# Altium PCB KNX-RELAY-24CH_V1.2.PcbDoc (part 1 of 2)
Units mm, origin at the board's own origin, x right, y up, seen from the top; angles counter-clockwise.
Board outline 85 x 205.5 mm, 2 copper layers (F.Cu, B.Cu); 269 components, 236 nets, 839 pads, 840 vias.
Unrouted connection lines stored in the file: 293.
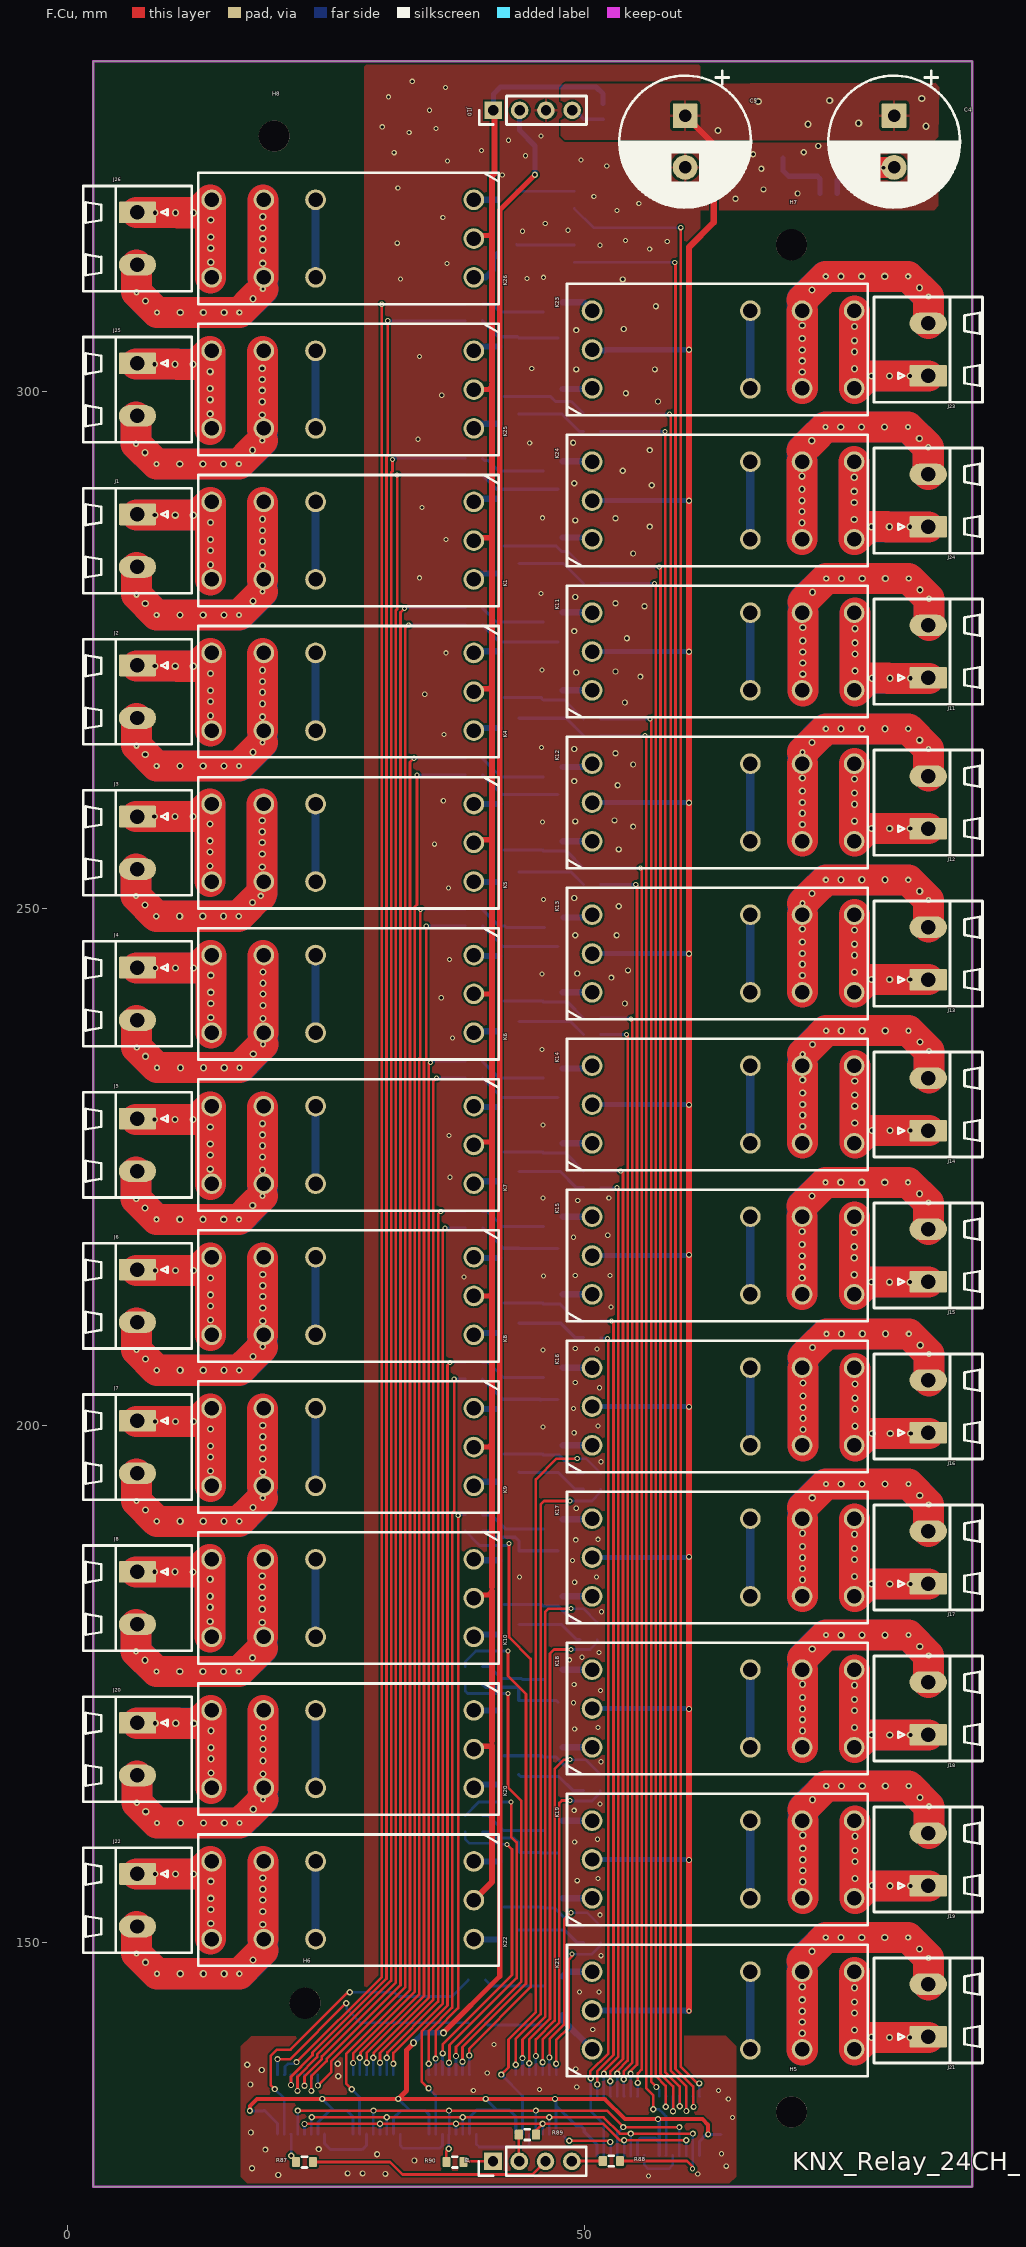
[diagram p0: F.Cu view]
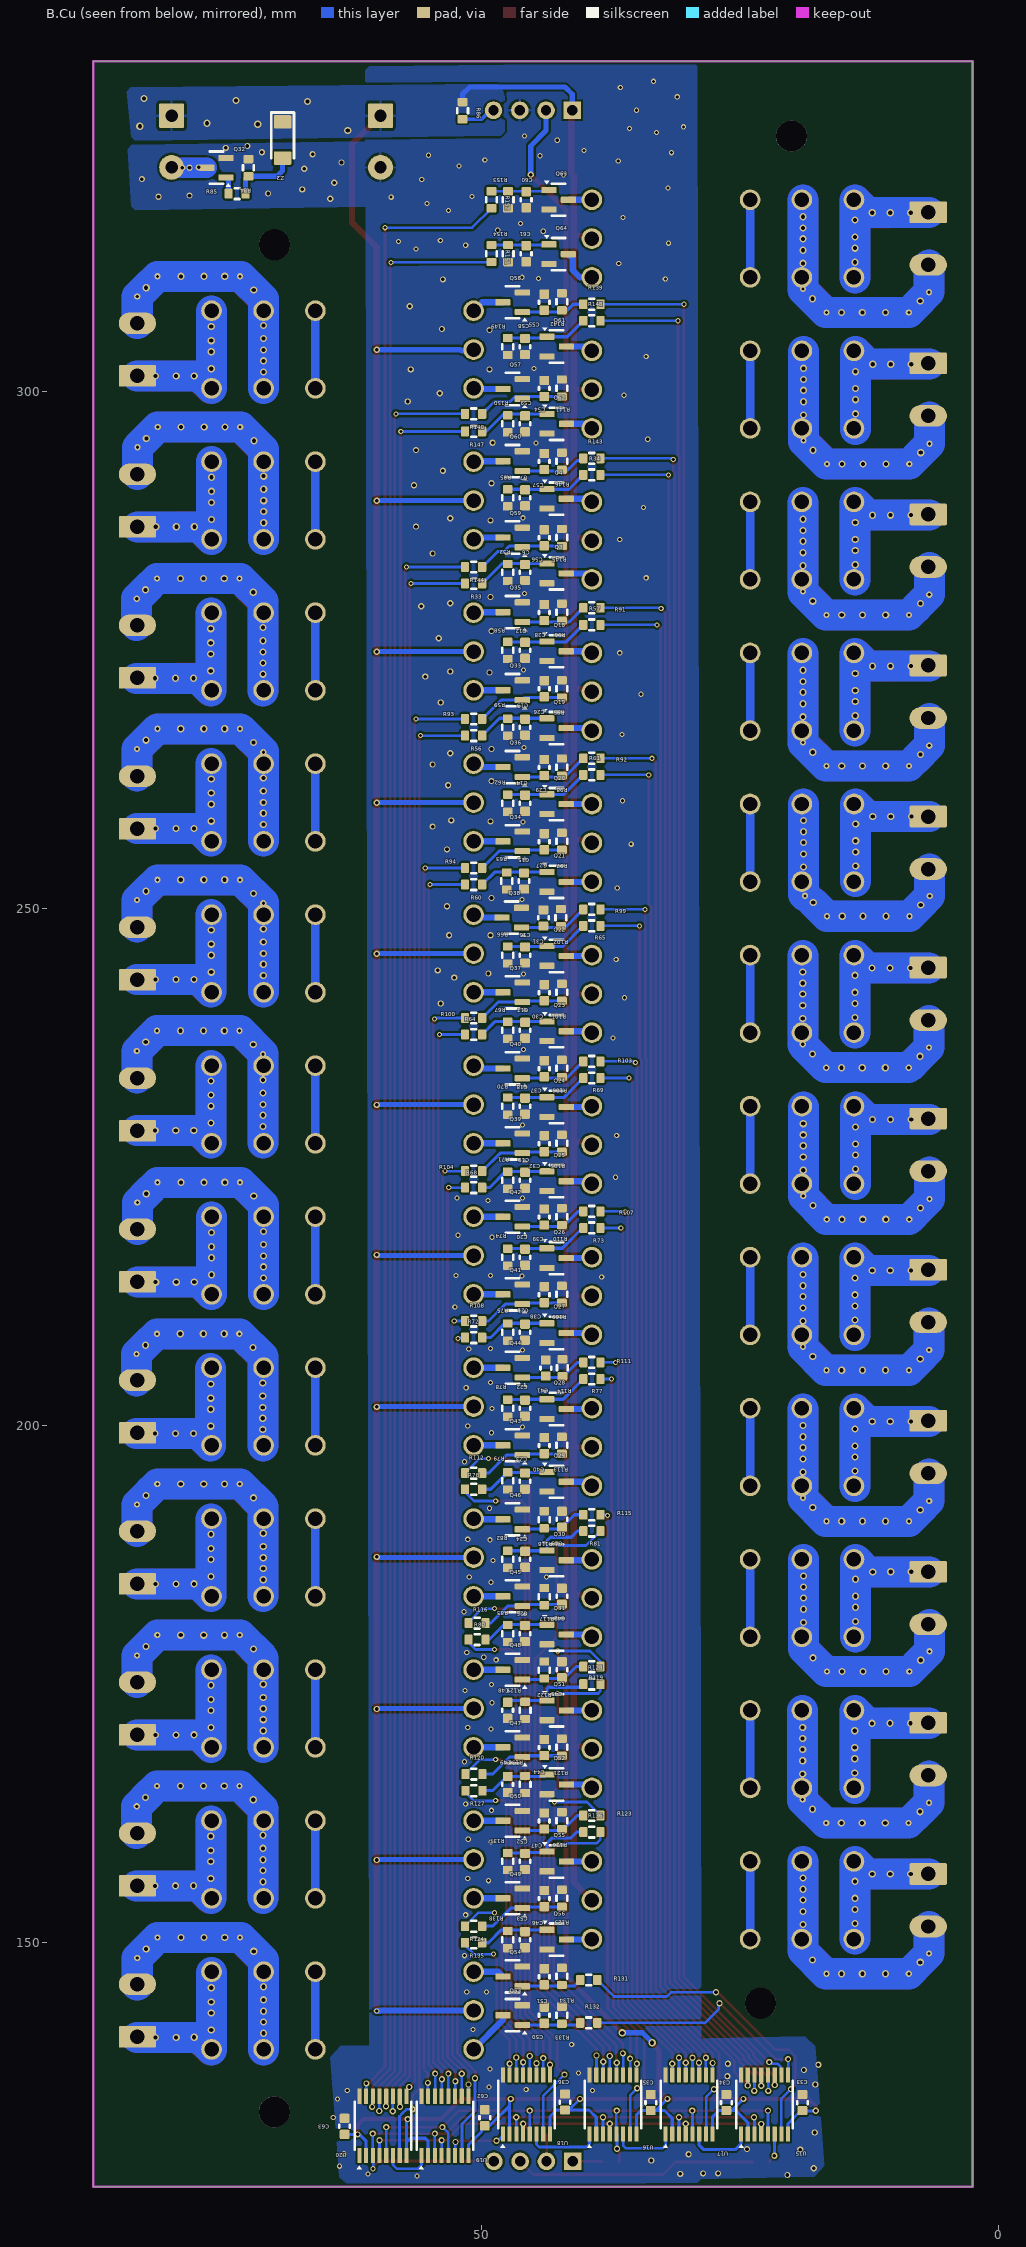
[diagram p1: B.Cu view, seen from below]
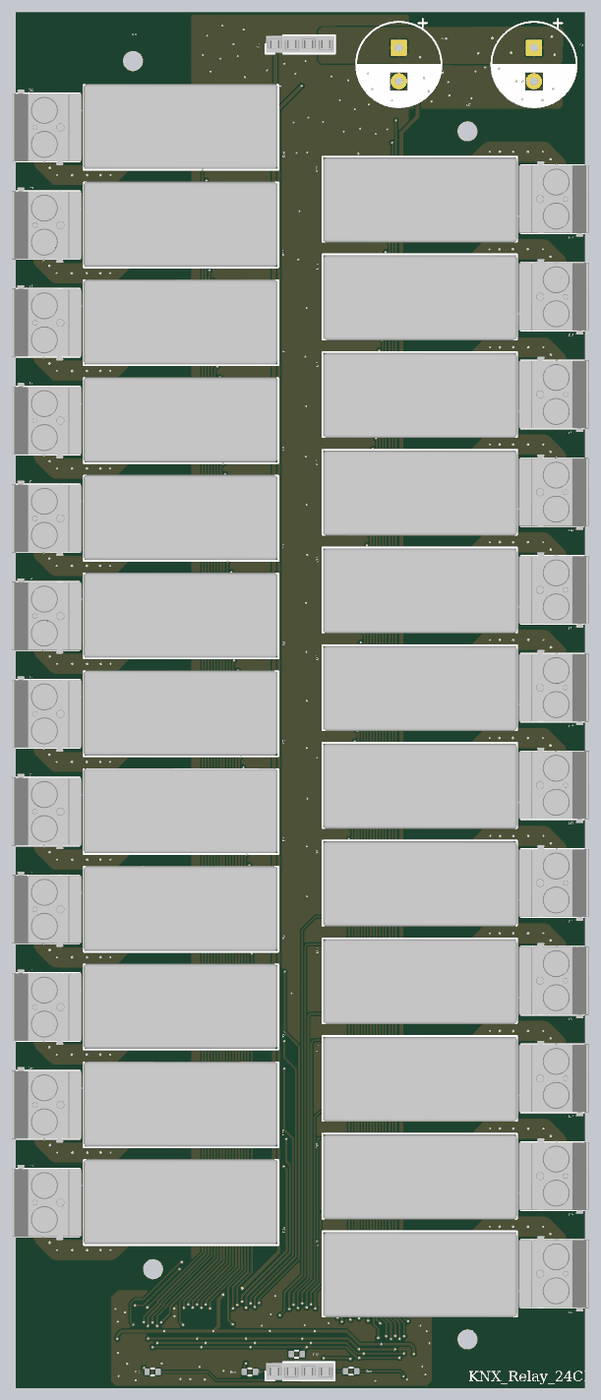
[diagram p3: 3D render of the assembled board from above, using the file's embedded part models]

## Layer stack, top to bottom
F.Mask: solder mask 0.0102, Solder Resist, Dk 3.5
F.Cu: signal copper 0.0356
Dielectric 1: dielectric 0.32, FR-4, Dk 4.8
B.Cu: signal copper 0.0356
B.Mask: solder mask 0.0102, Solder Resist, Dk 3.5

## Board outline
2.498,126.39 2.498,331.89 87.498,331.89 87.498,126.39

## Design rules (kind name [scope] priority, off if disabled: settings)
Clearance [All] p1: gap=0.2 ignorepadtopadclearanceinfootprint=TRUE
Clearance "Clearence 0,5_Polygon" [InNamedPolygon('F.Cu-') OR InNamedPolygon('B.Cu-') OR InNamedPolygon('F.Cu--1') OR InNamedPolygon('B.Cu--1')] p2: gap=0.5 ignorepadtopadclearanceinfootprint=FALSE
Clearance "Clearence 0,35_Polygon" [InNamedPolygon('F.Cu--2') OR InNamedPolygon('B.Cu--2')] p3: gap=0.35 ignorepadtopadclearanceinfootprint=FALSE
Clearance "Clearence 0,3_Polygon" [InNamedPolygon('F.Cu--3') OR InNamedPolygon('B.Cu--3')] p4: gap=0.3 ignorepadtopadclearanceinfootprint=FALSE
Clearance "Clearence 0,2_NetClass" [InNetClass('Default')] p5: gap=0.2 ignorepadtopadclearanceinfootprint=FALSE
MinimumSolderMaskSliver [All] p1: minsoldermaskwidth=0
PolygonConnect [All] p1: thpad.connectstyle=Relief thpad.reliefconductorwidth=0.254 thpad.reliefentries=4 thpad.polygonreliefangle="90 Angle" thpad.airgapwidth=0.254 smdpad.connectstyle=Direct smdpad.reliefconductorwidth=0.254 smdpad.reliefentries=4 smdpad.polygonreliefangle="90 Angle" smdpad.airgapwidth=0.254 via.connectstyle=Direct via.reliefconductorwidth=0.254 via.reliefentries=4 via.polygonreliefangle="90 Angle" via.airgapwidth=0.254
PolygonConnect Polygon_B.Cu--3_ConnectDirect [IsNamedPolygon('B.Cu--3') vs IsVia] p2: connectstyle=Direct reliefconductorwidth=0.254 reliefentries=4 polygonreliefangle="90 Angle" airgapwidth=0.254
PolygonConnect Polygon_B.Cu--3_ConnectRelief45 [IsNamedPolygon('B.Cu--3') vs (IsThruPin or IsSMTPin) and (PadShape_AllLayers = 'Round')] p3: connectstyle=Relief reliefconductorwidth=0.3 reliefentries=4 polygonreliefangle="45 Angle" airgapwidth=0.3
PolygonConnect Polygon_B.Cu--3_ConnectRelief90 [IsNamedPolygon('B.Cu--3') vs (IsThruPin or IsSMTPin) and (PadShape_AllLayers <> 'Round')] p4: connectstyle=Relief reliefconductorwidth=0.3 reliefentries=4 polygonreliefangle="90 Angle" airgapwidth=0.3
PolygonConnect Polygon_F.Cu--3_ConnectDirect [IsNamedPolygon('F.Cu--3') vs IsVia] p5: connectstyle=Direct reliefconductorwidth=0.254 reliefentries=4 polygonreliefangle="90 Angle" airgapwidth=0.254
PolygonConnect Polygon_F.Cu--3_ConnectRelief45 [IsNamedPolygon('F.Cu--3') vs (IsThruPin or IsSMTPin) and (PadShape_AllLayers = 'Round')] p6: connectstyle=Relief reliefconductorwidth=0.3 reliefentries=4 polygonreliefangle="45 Angle" airgapwidth=0.3
PolygonConnect Polygon_F.Cu--3_ConnectRelief90 [IsNamedPolygon('F.Cu--3') vs (IsThruPin or IsSMTPin) and (PadShape_AllLayers <> 'Round')] p7: connectstyle=Relief reliefconductorwidth=0.3 reliefentries=4 polygonreliefangle="90 Angle" airgapwidth=0.3
PolygonConnect Polygon_B.Cu--2_ConnectDirect [IsNamedPolygon('B.Cu--2') vs IsVia] p8: connectstyle=Direct reliefconductorwidth=0.254 reliefentries=4 polygonreliefangle="90 Angle" airgapwidth=0.254
PolygonConnect Polygon_B.Cu--2_ConnectRelief45 [IsNamedPolygon('B.Cu--2') vs (IsThruPin or IsSMTPin) and (PadShape_AllLayers = 'Round')] p9: connectstyle=Relief reliefconductorwidth=0.35 reliefentries=4 polygonreliefangle="45 Angle" airgapwidth=0.35
PolygonConnect Polygon_B.Cu--2_ConnectRelief90 [IsNamedPolygon('B.Cu--2') vs (IsThruPin or IsSMTPin) and (PadShape_AllLayers <> 'Round')] p10: connectstyle=Relief reliefconductorwidth=0.35 reliefentries=4 polygonreliefangle="90 Angle" airgapwidth=0.35
PolygonConnect Polygon_F.Cu--2_ConnectDirect [IsNamedPolygon('F.Cu--2') vs IsVia] p11: connectstyle=Direct reliefconductorwidth=0.254 reliefentries=4 polygonreliefangle="90 Angle" airgapwidth=0.254
PolygonConnect Polygon_F.Cu--2_ConnectRelief45 [IsNamedPolygon('F.Cu--2') vs (IsThruPin or IsSMTPin) and (PadShape_AllLayers = 'Round')] p12: connectstyle=Relief reliefconductorwidth=0.35 reliefentries=4 polygonreliefangle="45 Angle" airgapwidth=0.35
PolygonConnect Polygon_F.Cu--2_ConnectRelief90 [IsNamedPolygon('F.Cu--2') vs (IsThruPin or IsSMTPin) and (PadShape_AllLayers <> 'Round')] p13: connectstyle=Relief reliefconductorwidth=0.35 reliefentries=4 polygonreliefangle="90 Angle" airgapwidth=0.35
PolygonConnect Polygon_B.Cu--1_ConnectDirect [IsNamedPolygon('B.Cu--1') vs IsVia] p14: connectstyle=Direct reliefconductorwidth=0.254 reliefentries=4 polygonreliefangle="90 Angle" airgapwidth=0.254
PolygonConnect Polygon_B.Cu--1_ConnectRelief45 [IsNamedPolygon('B.Cu--1') vs (IsThruPin or IsSMTPin) and (PadShape_AllLayers = 'Round')] p15: connectstyle=Relief reliefconductorwidth=0.4 reliefentries=4 polygonreliefangle="45 Angle" airgapwidth=0.4
PolygonConnect Polygon_B.Cu--1_ConnectRelief90 [IsNamedPolygon('B.Cu--1') vs (IsThruPin or IsSMTPin) and (PadShape_AllLayers <> 'Round')] p16: connectstyle=Relief reliefconductorwidth=0.4 reliefentries=4 polygonreliefangle="90 Angle" airgapwidth=0.4
PolygonConnect Polygon_F.Cu--1_ConnectDirect [IsNamedPolygon('F.Cu--1') vs IsVia] p17: connectstyle=Direct reliefconductorwidth=0.254 reliefentries=4 polygonreliefangle="90 Angle" airgapwidth=0.254
PolygonConnect Polygon_F.Cu--1_ConnectRelief45 [IsNamedPolygon('F.Cu--1') vs (IsThruPin or IsSMTPin) and (PadShape_AllLayers = 'Round')] p18: connectstyle=Relief reliefconductorwidth=0.4 reliefentries=4 polygonreliefangle="45 Angle" airgapwidth=0.4
PolygonConnect Polygon_F.Cu--1_ConnectRelief90 [IsNamedPolygon('F.Cu--1') vs (IsThruPin or IsSMTPin) and (PadShape_AllLayers <> 'Round')] p19: connectstyle=Relief reliefconductorwidth=0.4 reliefentries=4 polygonreliefangle="90 Angle" airgapwidth=0.4
PolygonConnect Polygon_B.Cu-_ConnectDirect [IsNamedPolygon('B.Cu-') vs IsVia] p20: connectstyle=Direct reliefconductorwidth=0.254 reliefentries=4 polygonreliefangle="90 Angle" airgapwidth=0.254
PolygonConnect Polygon_B.Cu-_ConnectRelief45 [IsNamedPolygon('B.Cu-') vs (IsThruPin or IsSMTPin) and (PadShape_AllLayers = 'Round')] p21: connectstyle=Relief reliefconductorwidth=0.4 reliefentries=4 polygonreliefangle="45 Angle" airgapwidth=0.4
PolygonConnect Polygon_B.Cu-_ConnectRelief90 [IsNamedPolygon('B.Cu-') vs (IsThruPin or IsSMTPin) and (PadShape_AllLayers <> 'Round')] p22: connectstyle=Relief reliefconductorwidth=0.4 reliefentries=4 polygonreliefangle="90 Angle" airgapwidth=0.4
PolygonConnect Polygon_F.Cu-_ConnectDirect [IsNamedPolygon('F.Cu-') vs IsVia] p23: connectstyle=Direct reliefconductorwidth=0.254 reliefentries=4 polygonreliefangle="90 Angle" airgapwidth=0.254
PolygonConnect Polygon_F.Cu-_ConnectRelief45 [IsNamedPolygon('F.Cu-') vs (IsThruPin or IsSMTPin) and (PadShape_AllLayers = 'Round')] p24: connectstyle=Relief reliefconductorwidth=0.4 reliefentries=4 polygonreliefangle="45 Angle" airgapwidth=0.4
PolygonConnect Polygon_F.Cu-_ConnectRelief90 [IsNamedPolygon('F.Cu-') vs (IsThruPin or IsSMTPin) and (PadShape_AllLayers <> 'Round')] p25: connectstyle=Relief reliefconductorwidth=0.4 reliefentries=4 polygonreliefangle="90 Angle" airgapwidth=0.4
RoutingVias [All] p1: holewidth=0.711 width=1.27 viastyle="Through Hole" minholewidth=0.711 minwidth=1.27 maxholewidth=0.711 maxwidth=1.27
SilkToSilkClearance [All] p1: silktosilkclearance=0
SilkToSolderMaskClearance [IsPad] p1: minsilkscreentomaskgap=0 clearancetoexposedcopper=TRUE
SolderMaskExpansion [All] p1: expansion=0 istentingtop=FALSE
SupplyNets "Schematic Supply Nets_2" [InNet('+3V3')] p1: voltage=0.000
SupplyNets "Schematic Supply Nets_1" [InNet('GND')] p2: voltage=0.000
SupplyNets "Schematic Supply Nets" [InNet('+12V')] p3: voltage=0.000
Width [All] p1: maxlimit=10 minlimit=0.2 preferedwidth=0.2 minimp=50.000000 maximp=50.000000 favimp=50.000000
27 further rules are at their usual default settings.

## Classes and differential pairs
component class "Shift register": C33 C34 C35 C36 C62 C63 U15 U16 U17 U18 U19 U20
component class RELAYS: C6 C7 C12 C13 C14 C15 C16 C17 C18 C19 C20 C21 C22 C23 C24 C25 C26 C27 C28 C29 C30 C31 C32 C37 C38 C39 C40 C41 C42 C43 C44 C45 C46 C47 C48 C49 C50 C51 C52 C53 C54 C55 C56 C57 C58 C59 C60 C61 K1 K4 K5 K6 K7 K8 K9 K10 K11 K12 K13 K14 K15 K16 K17 K18 K19 K20 K22 K23 K24 K25 K26 Q3 Q4 Q18 Q19 Q20 Q21 Q22 Q23 Q24 Q25 Q26 Q27 Q28 Q29 Q30 Q31 Q33 Q34 Q35 Q36 Q37 Q38 Q39 Q40 Q41 Q42 Q43 Q44 Q45 Q46 Q47 Q48 Q49 Q50 Q51 Q52 Q53 Q54 Q55 Q56 Q57 Q58 Q59 Q60 Q61 Q62 Q63 Q64 R32 R33 R34 R35 R56 R57 R58 R59 R60 R61 R62 R63 R64 R65 R66 R67 R68 R69 R70 R71 R72 R73 R74 R75 R76 R77 R78 R79 R80 R81 R82 R83 R91 R92 R93 R94 R95 R96 R97 R98 R99 R100 R101 R102 R103 R104 R105 R106 R107 R108 R109 R110 R111 R112 R113 R114 R115 R116 R117 R118 R119 R120 R121 R122 R123 R124 R125 R126 R127 R128 R129 R130 R131 R132 R133 R134 R135 R136 R137 R138 R139 R140 R141 R142 R143 R144 R145 R146 R147 R148 R149 R150 R151 R152 R153 R154
component class KNX-RELAY-24CH_V0.2: C4 C5 H5 H6 H7 H8 J1 J2 J3 J4 J5 J6 J7 J8 J9 J10 J11 J12 J13 J14 J15 J16 J17 J18 J19 J20 J21 J22 J23 J24 J25 J26 Q32 R84 R85 R86 R87 R88 R89 R90 Z2

## Components (designator, comment, footprint, x,y, rotation, side; value= is the part's Value field where it differs from the comment)
C4 "3300uF/16V" CP_Radial_D12.5mm_P5.00mm 79.928,326.614 r270 top
C5 "3300uF/16V" CP_Radial_D12.5mm_P5.00mm 59.728,326.614 r270 top
C6 "100nF" C_0603_1608METRIC 45.758,282.46 r270 bottom
C7 "100nF" C_0603_1608METRIC 45.758,289.677 r270 bottom
C12 "100nF" C_0603_1608METRIC 45.758,274.927 r270 bottom
C13 "100nF" C_0603_1608METRIC 45.758,267.5 r270 bottom
C14 "100nF" C_0603_1608METRIC 45.758,260.15 r270 bottom
C15 "100nF" C_0603_1608METRIC 45.848,252.63 r270 bottom
C16 "100nF" C_0603_1608METRIC 45.758,245.472 r270 bottom
C17 "100nF" C_0603_1608METRIC 45.758,238.2 r270 bottom
C18 "100nF" C_0603_1608METRIC 45.758,230.868 r270 bottom
C19 "100nF" C_0603_1608METRIC 45.758,223.7 r270 bottom
C20 "100nF" C_0603_1608METRIC 45.758,216.264 r270 bottom
C21 "100nF" C_0603_1608METRIC 45.758,209.02 r270 bottom
C22 "100nF" C_0603_1608METRIC 45.758,201.67 r270 bottom
C23 "100nF" C_0603_1608METRIC 45.758,194.619 r270 bottom
C24 "100nF" C_0603_1608METRIC 45.758,187.057 r270 bottom
C25 "100nF" C_0603_1608METRIC 45.758,179.877 r270 bottom
C26 "100nF" C_0603_1608METRIC 43.898,271.225 r90 bottom
C27 "100nF" C_0603_1608METRIC 43.898,256.438 r90 bottom
C28 "100nF" C_0603_1608METRIC 43.898,278.59 r90 bottom
C29 "100nF" C_0603_1608METRIC 43.898,263.61 r90 bottom
C30 "100nF" C_0603_1608METRIC 43.898,241.841 r90 bottom
C31 "100nF" C_0603_1608METRIC 43.988,249.06 r90 bottom
C32 "100nF" C_0603_1608METRIC 43.898,227.243 r90 bottom
C33 "100nF" C_0603_1608METRIC 18.948,134.54 r90 bottom
C34 "100nF" C_0603_1608METRIC 26.298,134.54 r90 bottom
C35 "100nF" C_0603_1608METRIC 33.598,134.54 r90 bottom
C36 "100nF" C_0603_1608METRIC 41.898,134.59 r90 bottom
C37 "100nF" C_0603_1608METRIC 43.898,234.488 r90 bottom
C38 "100nF" C_0603_1608METRIC 43.898,212.646 r90 bottom
C39 "100nF" C_0603_1608METRIC 43.898,220.146 r90 bottom
C40 "100nF" C_0603_1608METRIC 43.898,198.049 r90 bottom
C41 "100nF" C_0603_1608METRIC 43.748,205.549 r90 bottom
C42 "100nF" C_0603_1608METRIC 42.198,183.482 r90 bottom
C43 "100nF" C_0603_1608METRIC 42.198,190.92 r90 bottom
C44 "100nF" C_0603_1608METRIC 43.898,168.86 r90 bottom
C45 "100nF" C_0603_1608METRIC 42.198,176.384 r90 bottom
C46 "100nF" C_0603_1608METRIC 43.898,154.257 r90 bottom
C47 "100nF" C_0603_1608METRIC 43.898,161.76 r90 bottom
C48 "100nF" C_0603_1608METRIC 47.438,172.453 r270 bottom
C49 "100nF" C_0603_1608METRIC 47.438,165.29 r270 bottom
C50 "100nF" C_0603_1608METRIC 43.898,142.99 r90 bottom
C51 "100nF" C_0603_1608METRIC 43.898,146.71 r90 bottom
C52 "100nF" C_0603_1608METRIC 45.758,157.85 r270 bottom
C53 "100nF" C_0603_1608METRIC 45.758,150.29 r270 bottom
C54 "100nF" C_0603_1608METRIC 43.898,300.25 r90 bottom
C55 "100nF" C_0603_1608METRIC 43.898,308.59 r90 bottom
C56 "100nF" C_0603_1608METRIC 43.898,285.81 r90 bottom
C57 "100nF" C_0603_1608METRIC 43.898,293.19 r90 bottom
C58 "100nF" C_0603_1608METRIC 45.758,304.3 r270 bottom
C59 "100nF" C_0603_1608METRIC 45.758,296.83 r270 bottom
C60 "100nF" C_0603_1608METRIC 45.648,318.49 r270 bottom
C61 "100nF" C_0603_1608METRIC 45.648,313.28 r270 bottom
C62 "100nF" C_0603_1608METRIC 49.648,133.065 r90 bottom
C63 "100nF" C_0603_1608METRIC 63.198,132.24 r90 bottom
H5 "MountingHole" MOUNTINGHOLE_3MM 69.998,133.64 r0 top
H6 "MountingHole" MOUNTINGHOLE_3MM 22.998,144.14 r0 top
H7 "MountingHole" MOUNTINGHOLE_3MM 69.998,314.14 r0 top
H8 "MountingHole" MOUNTINGHOLE_3MM 19.998,324.64 r0 top
J1 "DG129-5.08-02P-14-00AH" DG129-5.08-02P 6.778,288.073 r270 top
J2 "DG129-5.08-02P-14-00AH" DG129-5.08-02P 6.778,273.469 r270 top
J3 "DG129-5.08-02P-14-00AH" DG129-5.08-02P 6.778,258.865 r270 top
J4 "DG129-5.08-02P-14-00AH" DG129-5.08-02P 6.778,244.262 r270 top
J5 "DG129-5.08-02P-14-00AH" DG129-5.08-02P 6.778,229.658 r270 top
J6 "DG129-5.08-02P-14-00AH" DG129-5.08-02P 6.778,215.054 r270 top
J7 "DG129-5.08-02P-14-00AH" DG129-5.08-02P 6.778,200.451 r270 top
J8 "DG129-5.08-02P-14-00AH" DG129-5.08-02P 6.778,185.847 r270 top
J9 "Conn_01x04" PINHEADER_1X04_P2.54MM_VERTICAL 41.148,128.86 r90 top
J10 "Conn_01x04" PINHEADER_1X04_P2.54MM_VERTICAL 41.188,327.14 r90 top
J11 "DG129-5.08-02P-14-00AH" DG129-5.08-02P 83.228,272.275 r90 top
J12 "DG129-5.08-02P-14-00AH" DG129-5.08-02P 83.228,257.678 r90 top
J13 "DG129-5.08-02P-14-00AH" DG129-5.08-02P 83.228,243.081 r90 top
J14 "DG129-5.08-02P-14-00AH" DG129-5.08-02P 83.228,228.483 r90 top
J15 "DG129-5.08-02P-14-00AH" DG129-5.08-02P 83.228,213.886 r90 top
J16 "DG129-5.08-02P-14-00AH" DG129-5.08-02P 83.228,199.289 r90 top
J17 "DG129-5.08-02P-14-00AH" DG129-5.08-02P 83.228,184.692 r90 top
J18 "DG129-5.08-02P-14-00AH" DG129-5.08-02P 83.228,170.094 r90 top
J19 "DG129-5.08-02P-14-00AH" DG129-5.08-02P 83.228,155.497 r90 top
J20 "DG129-5.08-02P-14-00AH" DG129-5.08-02P 6.778,171.243 r270 top
J21 "DG129-5.08-02P-14-00AH" DG129-5.08-02P 83.228,140.9 r90 top
J22 "DG129-5.08-02P-14-00AH" DG129-5.08-02P 6.778,156.64 r270 top
J23 "DG129-5.08-02P-14-00AH" DG129-5.08-02P 83.228,301.47 r90 top
J24 "DG129-5.08-02P-14-00AH" DG129-5.08-02P 83.228,286.873 r90 top
J25 "DG129-5.08-02P-14-00AH" DG129-5.08-02P 6.778,302.676 r270 top
J26 "DG129-5.08-02P-14-00AH" DG129-5.08-02P 6.778,317.28 r270 top
K1 "RT314F12" RELAY9-500X1142_618 39.298,285.533 r180 top
K4 "RT314F12" RELAY9-500X1142_618 39.298,270.929 r180 top
K5 "RT314F12" RELAY9-500X1142_618 39.298,256.325 r180 top
K6 "RT314F12" RELAY9-500X1142_618 39.298,241.722 r180 top
K7 "RT314F12" RELAY9-500X1142_618 39.298,227.118 r180 top
K8 "RT314F12" RELAY9-500X1142_618 39.298,212.514 r180 top
K9 "RT314F12" RELAY9-500X1142_618 39.298,197.911 r180 top
K10 "RT314F12" RELAY9-500X1142_618 39.298,183.307 r180 top
K11 "RT314F12" RELAY9-500X1142_618 50.728,274.815 r0 top
K12 "RT314F12" RELAY9-500X1142_618 50.728,260.218 r0 top
K13 "RT314F12" RELAY9-500X1142_618 50.728,245.621 r0 top
K14 "RT314F12" RELAY9-500X1142_618 50.728,231.023 r0 top
K15 "RT314F12" RELAY9-500X1142_618 50.728,216.426 r0 top
K16 "RT314F12" RELAY9-500X1142_618 50.728,201.829 r0 top
K17 "RT314F12" RELAY9-500X1142_618 50.728,187.232 r0 top
K18 "RT314F12" RELAY9-500X1142_618 50.728,172.634 r0 top
K19 "RT314F12" RELAY9-500X1142_618 50.728,158.037 r0 top
K20 "RT314F12" RELAY9-500X1142_618 39.298,168.703 r180 top
K21 "RT314F12" RELAY9-500X1142_618 50.728,143.44 r0 top
K22 "RT314F12" RELAY9-500X1142_618 39.298,154.1 r180 top
K23 "RT314F12" RELAY9-500X1142_618 50.728,304.01 r0 top
K24 "RT314F12" RELAY9-500X1142_618 50.728,289.413 r0 top
K25 "RT314F12" RELAY9-500X1142_618 39.298,300.136 r180 top
K26 "RT314F12" RELAY9-500X1142_618 39.298,314.74 r180 top
Q3 "2N7002ET1G" SOT-23 42.708,282.372 r0 bottom
Q4 "2N7002ET1G" SOT-23 42.708,289.59 r0 bottom
Q18 "2N7002ET1G" SOT-23 42.708,274.84 r0 bottom
Q19 "2N7002ET1G" SOT-23 42.708,267.412 r0 bottom
Q20 "2N7002ET1G" SOT-23 42.708,260.062 r0 bottom
Q21 "2N7002ET1G" SOT-23 42.708,252.542 r0 bottom
Q22 "2N7002ET1G" SOT-23 42.708,245.384 r0 bottom
Q23 "2N7002ET1G" SOT-23 42.708,238.112 r0 bottom
Q24 "2N7002ET1G" SOT-23 42.708,230.78 r0 bottom
Q25 "2N7002ET1G" SOT-23 42.708,223.612 r0 bottom
Q26 "2N7002ET1G" SOT-23 42.708,216.177 r0 bottom
Q27 "2N7002ET1G" SOT-23 42.708,208.932 r0 bottom
Q28 "2N7002ET1G" SOT-23 42.708,201.582 r0 bottom
Q29 "2N7002ET1G" SOT-23 42.708,194.552 r0 bottom
Q30 "2N7002ET1G" SOT-23 42.708,186.97 r0 bottom
Q31 "2N7002ET1G" SOT-23 42.708,179.79 r0 bottom
Q32 "2N7002ET1G" SOT-23 75.598,321.59 r180 bottom
Q33 "2N7002ET1G" SOT-23 46.958,271.08 r180 bottom
Q34 "2N7002ET1G" SOT-23 46.958,256.468 r180 bottom
Q35 "2N7002ET1G" SOT-23 46.958,278.62 r180 bottom
Q36 "2N7002ET1G" SOT-23 46.958,263.64 r180 bottom
Q37 "2N7002ET1G" SOT-23 46.958,241.871 r180 bottom
Q38 "2N7002ET1G" SOT-23 47.048,249.09 r180 bottom
Q39 "2N7002ET1G" SOT-23 46.958,227.273 r180 bottom
Q40 "2N7002ET1G" SOT-23 46.958,234.518 r180 bottom
Q41 "2N7002ET1G" SOT-23 46.958,212.676 r180 bottom
Q42 "2N7002ET1G" SOT-23 46.958,220.176 r180 bottom
Q43 "2N7002ET1G" SOT-23 46.958,198.079 r180 bottom
Q44 "2N7002ET1G" SOT-23 46.958,205.579 r180 bottom
Q45 "2N7002ET1G" SOT-23 46.958,183.482 r180 bottom
Q46 "2N7002ET1G" SOT-23 46.958,190.92 r180 bottom
Q47 "2N7002ET1G" SOT-23 46.958,168.884 r180 bottom
Q48 "2N7002ET1G" SOT-23 46.958,176.384 r180 bottom
Q49 "2N7002ET1G" SOT-23 46.958,154.287 r180 bottom
Q50 "2N7002ET1G" SOT-23 46.958,161.787 r180 bottom
Q51 "2N7002ET1G" SOT-23 42.698,172.453 r0 bottom
Q52 "2N7002ET1G" SOT-23 42.698,165.29 r0 bottom
Q53 "2N7002ET1G" SOT-23 46.958,142.99 r180 bottom
Q54 "2N7002ET1G" SOT-23 46.958,146.74 r180 bottom
Q55 "2N7002ET1G" SOT-23 42.698,157.85 r0 bottom
Q56 "2N7002ET1G" SOT-23 42.698,150.29 r0 bottom
Q57 "2N7002ET1G" SOT-23 46.958,300.2 r180 bottom
Q58 "2N7002ET1G" SOT-23 46.958,308.58 r180 bottom
Q59 "2N7002ET1G" SOT-23 46.958,285.84 r180 bottom
Q60 "2N7002ET1G" SOT-23 46.958,293.22 r180 bottom
Q61 "2N7002ET1G" SOT-23 42.698,304.3 r0 bottom
Q62 "2N7002ET1G" SOT-23 42.698,296.83 r0 bottom
Q63 "2N7002ET1G" SOT-23 42.508,318.49 r0 bottom
Q64 "2N7002ET1G" SOT-23 42.508,313.23 r0 bottom
R32 "10K" R_0603_1608METRIC 47.438,282.46 r270 bottom
R33 "1K" R_0603_1608METRIC 50.728,281.39 r180 bottom
R34 "1K" R_0603_1608METRIC 39.298,291.89 r0 bottom
R35 "10K" R_0603_1608METRIC 47.438,289.677 r270 bottom
R56 "1K" R_0603_1608METRIC 50.728,266.69 r180 bottom
R57 "1K" R_0603_1608METRIC 39.298,277.39 r0 bottom
R58 "10K" R_0603_1608METRIC 47.438,274.927 r270 bottom
R59 "10K" R_0603_1608METRIC 47.438,267.5 r270 bottom
R60 "1K" R_0603_1608METRIC 50.728,252.29 r180 bottom
R61 "1K" R_0603_1608METRIC 39.298,262.89 r0 bottom
R62 "10K" R_0603_1608METRIC 47.438,260.15 r270 bottom
R63 "10K" R_0603_1608METRIC 47.528,252.63 r270 bottom
R64 "1K" R_0603_1608METRIC 50.728,237.79 r180 bottom
R65 "1K" R_0603_1608METRIC 39.298,248.29 r0 bottom
R66 "10K" R_0603_1608METRIC 47.438,245.472 r270 bottom
R67 "10K" R_0603_1608METRIC 47.438,238.2 r270 bottom
R68 "1K" R_0603_1608METRIC 50.728,222.99 r180 bottom
R69 "1K" R_0603_1608METRIC 39.298,233.59 r0 bottom
R70 "10K" R_0603_1608METRIC 47.438,230.868 r270 bottom
R71 "10K" R_0603_1608METRIC 47.438,223.7 r270 bottom
R72 "1K" R_0603_1608METRIC 50.728,208.49 r180 bottom
R73 "1K" R_0603_1608METRIC 39.298,219.09 r0 bottom
R74 "10K" R_0603_1608METRIC 47.438,216.264 r270 bottom
R75 "10K" R_0603_1608METRIC 47.438,209.02 r270 bottom
R76 "1K" R_0603_1608METRIC 50.728,193.83 r180 bottom
R77 "1K" R_0603_1608METRIC 39.298,204.49 r0 bottom
R78 "10K" R_0603_1608METRIC 47.438,201.67 r270 bottom
R79 "10K" R_0603_1608METRIC 47.438,194.64 r270 bottom
R80 "1K" R_0603_1608METRIC 50.398,179.29 r180 bottom
R81 "1K" R_0603_1608METRIC 39.298,189.79 r0 bottom
R82 "10K" R_0603_1608METRIC 47.438,187.057 r270 bottom
R83 "10K" R_0603_1608METRIC 47.438,179.877 r270 bottom
R84 "10K" R_0603_1608METRIC 72.498,321.59 r90 bottom
R85 "10K" R_0603_1608METRIC 73.598,319.09 r0 bottom
R86 "0R" R_0603_1608METRIC 51.8,327.1 r90 bottom
R87 "33R" R_0603_1608METRIC 22.928,128.79 r180 top
R88 "33R" R_0603_1608METRIC 52.598,128.89 r0 top
R89 "33R" R_0603_1608METRIC 44.473,131.44 r0 top
R90 "33R" R_0603_1608METRIC 37.473,128.79 r180 top
R91 "1K" R_0603_1608METRIC 39.298,279.04 r0 bottom
R92 "1K" R_0603_1608METRIC 39.298,264.49 r0 bottom
R93 "1K" R_0603_1608METRIC 50.728,268.29 r180 bottom
R94 "1K" R_0603_1608METRIC 50.728,253.89 r180 bottom
R95 "10K" R_0603_1608METRIC 42.198,271.205 r90 bottom
R96 "10K" R_0603_1608METRIC 42.198,278.62 r90 bottom
R97 "10K" R_0603_1608METRIC 42.198,256.468 r90 bottom
R98 "10K" R_0603_1608METRIC 42.198,263.64 r90 bottom
R99 "1K" R_0603_1608METRIC 39.298,249.89 r0 bottom
R100 "1K" R_0603_1608METRIC 50.728,239.39 r180 bottom
R101 "10K" R_0603_1608METRIC 42.198,241.871 r90 bottom
R102 "10K" R_0603_1608METRIC 42.288,249.09 r90 bottom
R103 "1K" R_0603_1608METRIC 39.298,235.19 r0 bottom
R104 "1K" R_0603_1608METRIC 50.728,224.59 r180 bottom
R105 "10K" R_0603_1608METRIC 42.198,227.273 r90 bottom
R106 "10K" R_0603_1608METRIC 42.198,234.518 r90 bottom
R107 "1K" R_0603_1608METRIC 39.298,220.69 r0 bottom
R108 "1K" R_0603_1608METRIC 50.728,210.09 r180 bottom
R109 "10K" R_0603_1608METRIC 42.198,212.676 r90 bottom
R110 "10K" R_0603_1608METRIC 42.198,220.176 r90 bottom
R111 "1K" R_0603_1608METRIC 39.298,206.09 r0 bottom
R112 "1K" R_0603_1608METRIC 50.728,195.39 r180 bottom
R113 "10K" R_0603_1608METRIC 42.198,198.079 r90 bottom
R114 "10K" R_0603_1608METRIC 42.148,205.579 r90 bottom
R115 "1K" R_0603_1608METRIC 39.298,191.36 r0 bottom
R116 "1K" R_0603_1608METRIC 50.398,180.89 r180 bottom
R117 "10K" R_0603_1608METRIC 43.898,183.452 r90 bottom
R118 "10K" R_0603_1608METRIC 43.898,190.89 r90 bottom
R119 "1K" R_0603_1608METRIC 39.298,176.69 r0 bottom
R120 "1K" R_0603_1608METRIC 50.698,166.29 r180 bottom
R121 "10K" R_0603_1608METRIC 42.198,168.89 r90 bottom
R122 "10K" R_0603_1608METRIC 43.898,176.354 r90 bottom
R123 "1K" R_0603_1608METRIC 39.298,162.29 r0 bottom
R124 "1K" R_0603_1608METRIC 50.728,151.59 r180 bottom
R125 "10K" R_0603_1608METRIC 42.198,154.287 r90 bottom
R126 "10K" R_0603_1608METRIC 42.198,161.79 r90 bottom
R127 "1K" R_0603_1608METRIC 50.698,164.69 r180 bottom
R128 "1K" R_0603_1608METRIC 39.298,174.99 r0 bottom
R129 "10K" R_0603_1608METRIC 45.758,172.453 r270 bottom
R130 "10K" R_0603_1608METRIC 45.758,165.29 r270 bottom
R131 "1K" R_0603_1608METRIC 39.598,146.39 r0 bottom
R132 "1K" R_0603_1608METRIC 39.598,142.24 r0 bottom
R133 "10K" R_0603_1608METRIC 42.198,142.99 r90 bottom
R134 "10K" R_0603_1608METRIC 42.198,146.74 r90 bottom
R135 "1K" R_0603_1608METRIC 50.728,149.99 r180 bottom
R136 "1K" R_0603_1608METRIC 39.298,160.69 r0 bottom
R137 "10K" R_0603_1608METRIC 47.438,157.85 r270 bottom
R138 "10K" R_0603_1608METRIC 47.438,150.29 r270 bottom
R139 "1K" R_0603_1608METRIC 39.298,308.39 r0 bottom
R140 "1K" R_0603_1608METRIC 50.728,297.79 r180 bottom
R141 "10K" R_0603_1608METRIC 42.198,300.28 r90 bottom
R142 "10K" R_0603_1608METRIC 42.198,308.62 r90 bottom
R143 "1K" R_0603_1608METRIC 39.298,293.49 r0 bottom
R144 "1K" R_0603_1608METRIC 50.728,282.99 r180 bottom
R145 "10K" R_0603_1608METRIC 42.198,285.84 r90 bottom
R146 "10K" R_0603_1608METRIC 42.198,293.22 r90 bottom
R147 "1K" R_0603_1608METRIC 50.728,296.09 r180 bottom
R148 "1K" R_0603_1608METRIC 39.298,306.79 r0 bottom
R149 "10K" R_0603_1608METRIC 47.438,304.3 r270 bottom
R150 "10K" R_0603_1608METRIC 47.438,296.83 r270 bottom
R151 "1K" R_0603_1608METRIC 48.998,313.29 r90 bottom
R152 "1K" R_0603_1608METRIC 48.998,318.49 r90 bottom
R153 "10K" R_0603_1608METRIC 47.398,318.49 r270 bottom
R154 "10K" R_0603_1608METRIC 47.398,313.28 r270 bottom
U15 "74HC595PW,118" TSSOP-16_4.4X5MM_P0.65MM 22.598,134.352 r90 bottom
U16 "74HC595PW,118" TSSOP-16_4.4X5MM_P0.65MM 37.248,134.352 r90 bottom
U17 "74HC595PW,118" TSSOP-16_4.4X5MM_P0.65MM 29.898,134.352 r90 bottom
U18 "74HC595PW,118" TSSOP-16_4.4X5MM_P0.65MM 45.623,134.352 r90 bottom
U19 "74HC595PW,118" TSSOP-16_4.4X5MM_P0.65MM 53.498,132.29 r90 bottom
U20 "74HC595PW,118" TSSOP-16_4.4X5MM_P0.65MM 59.498,132.29 r90 bottom
Z2 "6.8V" D_MINIMELF 69.198,324.267 r90 bottom

## Footprints (in the part's own frame and the unit in brackets; to place one, negate y for a bottom-side part, rotate by r counter-clockwise, add the part's x,y. Pads: shape width x height; smd on the part's side, far side on the other; paste and mask are expansions set on the pad)
C_0603_1608METRIC [mm]
  rrect25% 0.9x0.95 smd mask+0: 1(0.775,0) 2(-0.775,0)
  silkscreen extent -0.14,-0.51 0.14,0.51
CP_Radial_D12.5mm_P5.00mm [mm]
  rrect10% 2.4x2.4 hole 1.2 mask+0: 1(0,0)
  round 2.4 hole 1.2 mask+0: 2(5,0)
  silkscreen extent -4.32,-6.37 8.87,6.37
D_MINIMELF [mm]
  rrect19% 1.3x1.7 smd mask+0: 1(1.75,0) 2(-1.75,0)
  silkscreen extent -1.75,-1.11 2.66,1.11
DG129-5.08-02P [mm]
  rrect12% 2.1x3.6 hole 1.4 mask+0: 1(0,0)
  rrect100% 2.1x3.6 hole 1.4 mask+0: 2(5.08,0)
  silkscreen extent -2.54,-5.25 7.62,5.25, body extent -3.08,-4.92 8.18,5.58, height 19.51
MOUNTINGHOLE_3MM [mm]
  round 3 hole 3 mask+0: Un1(0,0)
PINHEADER_1X04_P2.54MM_VERTICAL [mm]
  rect 1.7x1.7 hole 1 mask+0: 1(0,0)
  round 1.7 hole 1 mask+0: 2(0,-2.54) 3(0,-5.08) 4(0,-7.62)
  silkscreen extent -1.38,-9 1.38,1.38, body extent -1.26,-8.89 1.26,1.27, height 8.5
R_0603_1608METRIC [mm]
  rrect25% 0.8x0.95 smd mask+0: 1(-0.825,0) 2(0.825,0)
  silkscreen extent -0.24,-0.52 0.24,0.52
RELAY9-500X1142_618 [mm]
  round 2 hole 1.4 mask+0: 11(20.3,-3.75) 11(20.3,3.75) 12(15.3,-3.75) 12(15.3,3.75) 14(25.34,-3.75) 14(25.34,3.75) A1(0,-3.75) A2(0,3.75) A3(0,0)
  silkscreen extent -2.42,-6.35 26.65,6.35, body extent -2.31,-6.48 26.69,6.22, height 15.7
SOT-23 [mm]
  rrect25% 1.475x0.6 smd mask+0: 1(0.937,-0.95) 2(0.937,0.95) 3(-0.937,0)
  silkscreen extent -0.65,-1.84 1.4,1.56
TSSOP-16_4.4X5MM_P0.65MM [mm]
  rrect25% 1.475x0.4 smd mask+0: 1(-2.863,2.275) 2(-2.863,1.625) 3(-2.863,0.975) 4(-2.863,0.325) 5(-2.863,-0.325) 6(-2.863,-0.975) 7(-2.863,-1.625) 8(-2.863,-2.275) 9(2.863,-2.275) 10(2.863,-1.625) 11(2.863,-0.975) 12(2.863,-0.325) 13(2.863,0.325) 14(2.863,0.975) 15(2.863,1.625) 16(2.863,2.275)
  silkscreen extent -4.19,-2.74 2.31,2.74

## Part data
C4 C5: library part C_US, Package="THT 12.5x25mm", MF=KOSHIN, MP=PKLH-016V332MH250, OZD=PKLH-016V332MH250
C6 C7 C12 C13 C14 C15 C16 C17 C18 C19 C20 C21 C22 C23 C24 C25 C26 C27 C28 C29 C30 C31 C32 C37 C38 C39 C40 C41 C42 C43 C44 C45 C46 C47 C48 C49 C50 C51 C52 C53 C54 C55 C56 C57 C58 C59 C60 C61: library part C_3, Package=C_0603, MF=YAGEO, MP=CC0603KRX7R9BB104, OZD=CC0603KRX7R9BB104
C33 C34 C35 C36 C62 C63: library part C, Package=C0603, MF=YAGEO, MP=CC0603KRX7R9BB104, OZD=CC0603KRX7R9BB104
J1 J2 J3 J4 J5 J6 J7 J8 J11 J12 J13 J14 J15 J16 J17 J18 J19 J20 J21 J22 J23 J24 J25 J26: library part Screw_Terminal_01x02, Package="THT V/T  5.08mm", MF=DEGSON, MP=DG129-5.08-02P-14-00AH, OZD=DG129-5.08-02P-14-00AH
K1 K4 K5 K6 K7 K8 K9 K10 K11 K12 K13 K14 K15 K16 K17 K18 K19 K20 K21 K22 K23 K24 K25 K26: library part RT314A03, Package=DIP,29x12.7mm, MF="TE Connectivity", MP=RT314F12, OZD=RT314F12
Q3 Q4 Q18 Q19 Q20 Q21 Q22 Q23 Q24 Q25 Q26 Q27 Q28 Q29 Q30 Q31 Q32 Q33 Q34 Q35 Q36 Q37 Q38 Q39 Q40 Q41 Q42 Q43 Q44 Q45 Q46 Q47 Q48 Q49 Q50 Q51 Q52 Q53 Q54 Q55 Q56 Q57 Q58 Q59 Q60 Q61 Q62 Q63 Q64: library part Q_NMOS_Depletion_GSD, Package=SOT-23, MF=onsemi, MP=2N7002ET1G, OZD=2N7002ET1G
R32 R33 R34 R35 R56 R57 R58 R59 R60 R61 R62 R63 R64 R65 R66 R67 R68 R69 R70 R71 R72 R73 R74 R75 R76 R77 R78 R79 R80 R81 R82 R83 R84 R85 R86 R87 R88 R89 R90 R91 R92 R93 R94 R95 R96 R97 R98 R99 R100 R101 R102 R103 R104 R105 R106 R107 R108 R109 R110 R111 R112 R113 R114 R115 R116 R117 R118 R119 R120 R121 R122 R123 R124 R125 R126 R127 R128 R129 R130 R131 R132 R133 R134 R135 R136 R137 R138 R139 R140 R141 R142 R143 R144 R145 R146 R147 R148 R149 R150 R151 R152 R153 R154: library part R_US, Package=R_0603
  R32 R35 R58 R59 R62 R63 R66 R67 R70 R71 R74 R75 R78 R79 R82 R83 R84 R85 R95 R96 R97 R98 R101 R102 R105 R106 R109 R110 R113 R114 R117 R118 R121 R122 R125 R126 R129 R130 R133 R134 R137 R138 R141 R142 R145 R146 R149 R150 R153 R154: MF=FOJAN, MP=FRC0603J103TS
  R33 R34 R56 R57 R60 R61 R64 R65 R68 R69 R72 R73 R76 R77 R80 R81 R91 R92 R93 R94 R99 R100 R103 R104 R107 R108 R111 R112 R115 R116 R119 R120 R123 R124 R127 R128 R131 R132 R135 R136 R139 R140 R143 R144 R147 R148 R151 R152: MF=YAGEO, MP=RC0603JR-071KL, OZD=RC0603JR-071KL
  R87 R88 R89 R90: MF=YAGEO, MP=RC0603JR-0733RL, OZD=RC0603JR-0733RL
U15 U16 U17 U18 U19 U20: library part 74HC595, Package=TSSOP-16, MF=Nexperia, MP=74HC595PW,118, OZD=74HC595PW,118
Z2: library part D_Zener, Package=D_MiniMELF, MF=PANJIT, MP=ZMM55-C6V8_R1_10001, OZD=ZMM55-C6V8_R1_10001

## Via types
v1: diameter 0.7, hole 0.4, F.Cu to B.Cu, tented both sides, 417 vias
v2: diameter 0.5, hole 0.3, F.Cu to B.Cu, tented both sides, 173 vias
v3: diameter 0.6, hole 0.35, F.Cu to B.Cu, tented both sides, 165 vias
v4: diameter 0.6, hole 0.3, F.Cu to B.Cu, tented both sides, 85 vias

## Nets (pads, with @x,y where several pads share a name; then routed paths per layer and width w, separated by ;. In a path a pad name is that pad's centre, name@x,y a point inside that pad or via, vN(x,y) a via of type N, cw(c..) or ccw(c..) an arc to the next point about the centre after c; other vN are vias at no path point)
+3V3: C33.2 C34.2 C35.2 C36.2 C62.2 C63.2 J10.2 U15.10 U15.16 U16.10 U16.16 U17.10 U17.16 U18.10 U18.16 U19.10 U19.16 U20.10 U20.16 | length 299.9
  F.Cu w0.4: v3(17.648,133.74) 17.648,134.19 18.348,134.89 v3(24.648,134.89) v3(31.998,134.89) v3(40.448,134.89) v3(47.148,134.89) 51.948,134.89 53.898,132.94 v3(57.098,132.94) 61.398,132.94 61.948,132.39 v3(61.948,131.465)
  F.Cu w0.5: v3(31.998,134.89) 32.798,135.69 32.798,139.592 33.47,140.264 v1(33.47,140.318) ; v1(36.358,141.28) 36.358,141.3 41.8,146.742 41.8,317.5 v3(45.2,320.9)
  B.Cu w0.3: v3(17.648,133.74) 18.923,133.74 C33.2@18.948,133.765 19.073,133.765 20.323,132.515 20.323,131.49 ; 24.223,131.49 24.223,132.615 25.373,133.765 25.773,133.765 ; v3(24.648,134.89) 25.773,133.765 ; 27.623,131.49 27.623,133.165 27.023,133.765 25.773,133.765 ; 31.523,131.49 31.523,133.015 32.273,133.765 C35.2@33.123,133.765 ; v3(31.998,134.89) C35.2@33.123,133.765 ; 34.973,131.49 34.973,133.365 34.573,133.765 C35.2@33.123,133.765 ; 38.873,131.49 38.873,133.115 39.573,133.815 C36.2@41.523,133.815 ; v3(40.448,134.89) C36.2@41.523,133.815 ; 43.348,131.49 43.348,133.19 42.723,133.815 C36.2@41.898,133.815 C36.2@41.523,133.815 ; v3(47.148,134.89) 47.248,134.79 47.248,134.24 ; 47.248,131.49 47.248,134.24 ; 48.448,133.04 48.898,132.59 ; 51.223,129.427 51.223,130.465 49.973,131.715 49.973,131.965 C62.2@49.648,132.29 49.198,132.29 48.898,132.59 ; 55.123,129.427 55.123,130.815 55.398,131.09 56.848,131.09 57.223,130.715 ; v3(57.098,132.94) 57.223,132.815 57.223,130.715 ; 57.223,129.427 57.223,130.715 ; 61.123,129.427 61.123,130.815 61.773,131.465 v3(61.948,131.465) C63.2@63.198,131.465 ; 47.248,134.24 48.898,132.59
  B.Cu w0.5: v1(33.47,140.318) 33.47,140.352 34.407,141.29 36.348,141.29 v1(36.358,141.28) ; J10.2@43.728,327.14 43.728,325.172 45.2,323.7 v3(45.2,320.9)
+12V: C4.1 C5.1 J10.1 K1.A3 K4.A3 K5.A3 K6.A3 K7.A3 K8.A3 K9.A3 K10.A3 K11.A3 K12.A3 K13.A3 K14.A3 K15.A3 K16.A3 K17.A3 K18.A3 K19.A3 K20.A3 K21.A3 K22.A3 K23.A3 K24.A3 K25.A3 K26.A3 R86.1 Z2.1 | length 507.7
  F.Cu w0.5: K20.A3@39.298,168.703 39.585,168.99 40.999,168.99 41.05,169.042 41.05,169.49 ; K10.A3@39.298,183.307 39.585,183.594 40.702,183.594 41.074,183.966 ; K9.A3@39.298,197.911 40.771,197.911 41.05,198.19 ; K8.A3@39.298,212.514 40.823,212.514 41.074,212.766 41.05,212.79 41.05,212.99 ; K7.A3@39.298,227.118 39.585,227.405 40.965,227.405 41.05,227.49 ; K6.A3@39.298,241.722 40.83,241.722 41.1,241.992 41.05,242.042 41.05,242.19 ; K5.A3@39.298,256.325 39.585,256.612 40.872,256.612 41.05,256.79 ; K4.A3@39.298,270.929 39.585,271.216 40.776,271.216 41.05,271.49 ; K1.A3@39.298,285.533 39.585,285.82 40.88,285.82 41.05,285.99 ; K25.A3@39.298,300.136 40.744,300.136 41.1,300.492 41.1,300.64 ; K26.A3@39.298,314.74 39.585,315.027 40.787,315.027 41.05,315.29 ; 41.05,184.39 41.05,183.99 ; 41.05,300.69 41.1,300.64 ; 41.05,300.99 41.1,300.94 41.1,300.64 ; 41.05,183.99 41.074,183.966 ; 41.05,183.99 41.074,183.966
  F.Cu w0.6: K22.A3@39.298,154.1 41.05,155.852 41.05,169.042 ; 41.05,169.49 41.05,183.99 ; 41.05,184.39 41.05,198.19 41.05,212.79 41.05,212.99 41.05,227.49 41.05,242.19 41.05,256.79 41.05,271.49 41.05,285.99 41.05,300.69 ; 41.05,300.99 41.05,315.29 41.05,320.816 41.298,321.064 J10.1@41.298,327.14 ; C5.1@59.728,326.614 62.498,323.844 62.498,316.303 60.098,313.903 v3(60.098,303.99) v3(60.098,289.39) v3(60.098,274.79) v3(60.098,260.19) v3(60.098,245.59) v3(60.098,230.99) v3(60.098,216.49) v3(60.098,201.79) v3(60.098,187.29) v3(60.098,172.59) v3(60.098,157.99) v2(60.098,143.39)
  B.Cu w0.5: J10.1@41.188,327.14 41.188,328.688 41.89,329.39 51.11,329.39 51.8,328.7 51.8,327.925 51.8,327.8 ; K19.A3@50.728,158.037 60.051,158.037 v3(60.098,157.99) ; K18.A3@50.728,172.634 60.053,172.634 v3(60.098,172.59) ; K17.A3@50.728,187.232 60.04,187.232 v3(60.098,187.29) ; K16.A3@50.728,201.829 60.059,201.829 v3(60.098,201.79) ; K15.A3@50.728,216.426 60.034,216.426 v3(60.098,216.49) ; K14.A3@50.728,231.023 60.064,231.023 v3(60.098,230.99) ; K13.A3@50.728,245.621 60.067,245.621 v3(60.098,245.59) ; K12.A3@50.728,260.218 60.07,260.218 v3(60.098,260.19) ; K11.A3@50.728,274.815 60.073,274.815 v3(60.098,274.79) ; K24.A3@50.728,289.413 60.075,289.413 v3(60.098,289.39) ; K23.A3@50.728,304.01 50.848,303.89 51.898,303.89 51.998,303.99 v3(60.098,303.99)
  B.Cu w0.6: K21.A3@50.728,143.44 59.748,143.44 59.798,143.39 v2(60.098,143.39)
  other v1: 62.898,325.19 82.998,325.59 71.598,325.79 76.498,325.89 66.798,327.99 73.698,328.09 82.598,328.29
GND: C5.2 C6.1 C7.1 C12.1 C13.1 C14.1 C15.1 C16.1 C17.1 C18.1 C19.1 C20.1 C21.1 C22.1 C23.1 C24.1 C25.1 C26.1 C27.1 C28.1 C29.1 C30.1 C31.1 C32.1 C33.1 C34.1 C35.1 C36.1 C37.1 C38.1 C39.1 C40.1 C41.1 C42.1 C43.1 C44.1 C45.1 C46.1 C47.1 C48.1 C49.1 C50.1 C51.1 C52.1 C53.1 C54.1 C55.1 C56.1 C57.1 C58.1 C59.1 C60.1 C61.1 C62.1 C63.1 J10.3 Q3.2 Q4.2 Q18.2 Q19.2 Q20.2 Q21.2 Q22.2 Q23.2 Q24.2 Q25.2 Q26.2 Q27.2 Q28.2 Q29.2 Q30.2 Q31.2 Q32.2 Q33.2 Q34.2 Q35.2 Q36.2 Q37.2 Q38.2 Q39.2 Q40.2 Q41.2 Q42.2 Q43.2 Q44.2 Q45.2 Q46.2 Q47.2 Q48.2 Q49.2 Q50.2 Q51.2 Q52.2 Q53.2 Q54.2 Q55.2 Q56.2 Q57.2 Q58.2 Q59.2 Q60.2 Q61.2 Q62.2 Q63.2 Q64.2 R32.1 R35.1 R58.1 R59.1 R62.1 R63.1 R66.1 R67.1 R70.1 R71.1 R74.1 R75.1 R78.1 R79.1 R82.1 R83.1 R84.1 R95.1 R96.1 R97.1 R98.1 R101.1 R102.1 R105.1 R106.1 R109.1 R110.1 R113.1 R114.1 R117.1 R118.1 R121.1 R122.1 R125.1 R126.1 R129.1 R130.1 R133.1 R134.1 R137.1 R138.1 R141.1 R142.1 R145.1 R146.1 R149.1 R150.1 R153.1 R154.1 U15.8 U16.8 U17.8 U18.8 U19.8 U20.8
  other v2: 56.198,127.44 60.948,127.64 63.698,128.39 63.248,129.59 64.298,133.09 63.898,134.89 39.248,135.69 62.948,135.69 45.648,135.79 49.248,136.04 40.598,137.39 49.148,137.79 41.248,140.14 50.798,141.59 49.498,145.24 51.398,145.24 51.598,148.74 51.498,152.69 49.298,155.99 51.298,156.19 49.048,159.74 51.248,159.99 48.998,162.79 51.498,163.39 51.598,167.49 49.048,170.64 51.298,170.79 48.948,173.19 51.548,174.39 48.998,174.94 48.548,177.34 49.748,177.59 51.398,178.04 51.648,181.99 49.048,184.84 43.698,185.34 51.148,185.34 48.848,186.94 49.148,188.94 51.298,188.99 49.198,191.99 51.598,196.49 48.998,199.29 45.998,199.84 51.298,199.94 48.948,201.64 51.448,203.64 49.098,204.14 45.998,207.29 51.198,207.39 49.098,207.44 52.548,211.44 38.348,214.34 46.048,214.44 49.098,214.49 52.448,214.49 48.948,218.19 52.248,218.39 49.348,221.74 45.998,221.99 52.348,221.99 36.998,223.99 36.898,228.04 45.998,229.04 45.898,236.34 37.248,237.44 36.148,241.34 45.898,243.64 36.948,245.04 46.048,250.84 36.848,251.94 35.498,256.19 45.948,258.34 36.348,260.39 45.848,265.54 36.398,266.79 34.548,270.69 45.898,273.04 36.598,274.69 45.798,280.44 34.048,281.94 36.598,285.64 45.948,287.74 34.298,288.74 44.698,294.99 33.898,295.34 36.198,299.59 44.898,302.19 34.048,303.34 32.198,310.84 44.448,310.89 46.048,310.99 36.698,312.34 56.298,313.74 51.498,314.09 31.898,314.29 57.998,314.44 53.948,314.54 43.998,315.44 48.398,315.54 46.198,316.19 36.298,316.79 53.148,317.44 55.248,318.14 58.698,318.74 50.898,318.79 31.948,319.64 55.748,320.44 42.048,320.89 52.148,321.74 36.748,322.24 49.648,322.34 44.298,322.74 55.098,322.79 31.598,323.04 40.048,323.24 42.648,324.24 45.798,324.64 33.048,324.99 35.648,325.39 30.448,325.54 34.998,327.14 31.048,328.44 36.548,329.34 33.348,329.94
  other v3: 20.398,127.54 30.748,127.64 27.098,127.69 28.548,127.69 17.848,128.19 33.548,128.94 29.948,129.54 19.148,129.99 24.298,130.04 17.748,131.64 17.698,136.29 26.198,137.09 18.798,137.69 17.398,138.19 26.148,138.29 53.898,240.79 52.598,243.29 49.298,243.69 54.198,243.99 49.098,247.39 53.098,247.39 53.298,250.19 48.998,250.99 53.298,255.69 54.698,257.89 49.098,258.39 52.898,258.49 53.198,261.89 48.998,262.29 54.698,263.89 52.998,264.99 48.998,265.39 53.898,269.89 55.398,272.39 49.198,272.79 52.998,272.89 54.098,276.09 48.998,276.79 55.798,279.19 52.998,279.49 49.098,280.09 54.698,284.29 56.298,286.89 49.098,287.49 52.998,287.69 56.498,290.89 48.998,291.09 53.698,292.29 56.298,294.29 48.898,294.99 57.098,298.99 53.998,299.79 49.198,302.09 56.798,302.09 49.198,305.89 53.798,305.99 56.898,308.19 53.698,310.79 64.598,318.59 81.198,318.79 78.198,318.89 70.598,319.09 67.298,319.49 64.198,320.14 82.798,320.49 67.098,321.49 63.498,322.09 66.298,322.89 71.198,323.09 74.7,323.5 72.598,323.69
NetC4_2: C4.2 Q32.3 | length 6.8
  F.Cu w2: 76.536,321.59 76.559,321.614 v3(77.298,321.614) C4.2@79.928,321.614
  B.Cu w2: Q32.3@76.536,321.59 v3(78.198,321.59) v3(78.898,321.59) 79.904,321.59 C4.2@79.928,321.614
NetC6_2: C6.2 Q3.1 R32.2 R33.1 | length 7.1
  B.Cu w0.3: Q3.1@43.646,283.322 47.971,283.322 49.903,281.39
NetC7_2: C7.2 Q4.1 R34.1 R35.2 | length 7.9
  B.Cu w0.3: 40.123,291.89 41.511,290.502 47.438,290.502
NetC12_2: C12.2 Q18.1 R57.1 R58.2 | length 8
  B.Cu w0.3: 40.123,277.39 41.761,275.752 47.438,275.752
NetC13_2: C13.2 Q19.1 R56.1 R59.2 | length 7
  B.Cu w0.3: Q19.1@43.646,268.362 48.231,268.362 49.903,266.69
NetC14_2: C14.2 Q20.1 R61.1 R62.2 | length 8.1
  B.Cu w0.3: 40.123,262.89 42.001,261.012 Q20.1@43.646,261.012 43.683,260.975 47.438,260.975
NetC15_2: C15.2 Q21.1 R60.1 R63.2 | length 6.8
  B.Cu w0.3: Q21.1@43.646,253.492 48.701,253.492 49.903,252.29
NetC16_2: C16.2 Q22.1 R65.1 R66.2 | length 8.1
  B.Cu w0.3: 40.123,248.29 42.116,246.297 47.438,246.297
NetC17_2: C17.2 Q23.1 R64.1 R67.2 | length 6.8
  B.Cu w0.3: Q23.1@43.646,239.062 48.631,239.062 49.903,237.79
NetC18_2: C18.2 Q24.1 R69.1 R70.2 | length 8.1
  B.Cu w0.3: 40.123,233.59 42.02,231.693 47.438,231.693
NetC19_2: C19.2 Q25.1 R68.1 R71.2 | length 6.9
  B.Cu w0.3: Q25.1@43.646,224.562 47.626,224.562 49.198,222.99 49.903,222.99
NetC20_2: C20.2 Q26.1 R73.1 R74.2 | length 8.1
  B.Cu w0.3: 40.123,219.09 40.198,219.09 42.161,217.127 Q26.1@43.646,217.127 43.683,217.089 47.438,217.089
NetC21_2: C21.2 Q27.1 R72.1 R75.2 | length 6.8
  B.Cu w0.3: Q27.1@43.646,209.882 47.706,209.882 49.098,208.49 49.903,208.49
NetC22_2: C22.2 Q28.1 R77.1 R78.2 | length 8.2
  B.Cu w0.3: 40.123,204.49 42.081,202.532 Q28.1@43.646,202.532 45.671,202.532 C22.2@45.758,202.445 45.808,202.495 47.438,202.495
NetC23_2: C23.2 Q29.1 R76.1 R79.2 | length 7
  B.Cu w0.3: Q29.1@43.646,195.502 43.683,195.465 47.438,195.465 49.073,193.83 49.903,193.83
NetC24_2: C24.2 Q30.1 R81.1 R82.2 | length 8.6
  B.Cu w0.3: 40.123,189.79 40.698,189.79 41.298,189.19 43.298,189.19 43.646,188.842 Q30.1@43.646,187.92 43.683,187.882 47.438,187.882
NetC25_2: C25.2 Q31.1 R80.1 R83.2 | length 6.5
  B.Cu w0.3: Q31.1@43.646,180.74 47.798,180.74 49.248,179.29 49.573,179.29
NetC26_2: C26.2 Q33.1 R93.1 R95.2 | length 8.6
  B.Cu w0.3: 42.198,270.38 45.771,270.38 Q33.1@46.021,270.13 48.063,270.13 49.903,268.29
NetC27_2: C27.2 Q34.1 R94.1 R97.2 | length 8.4
  B.Cu w0.3: 42.198,255.643 45.896,255.643 Q34.1@46.021,255.518 48.275,255.518 49.903,253.89
NetC28_2: C28.2 Q35.1 R91.1 R96.2 | length 6.5
  B.Cu w0.3: 40.123,279.04 41.493,277.67 Q35.1@46.021,277.67
NetC29_2: C29.2 Q36.1 R92.1 R98.2 | length 6.6
  B.Cu w0.3: 40.123,264.49 41.923,262.69 Q36.1@46.021,262.69
NetC30_2: C30.2 Q37.1 R100.1 R101.2 | length 8.4
  B.Cu w0.3: 42.198,241.046 45.896,241.046 Q37.1@46.021,240.921 48.372,240.921 49.903,239.39
NetC31_2: C31.2 Q38.1 R99.1 R102.2 | length 6.7
  B.Cu w0.3: 40.123,249.89 41.748,248.265 42.288,248.265 42.413,248.14 Q38.1@46.111,248.14
NetC32_2: C32.2 Q39.1 R104.1 R105.2 | length 8.5
  B.Cu w0.3: 42.198,226.448 45.896,226.448 Q39.1@46.021,226.323 48.169,226.323 49.903,224.59
NetC37_2: C37.2 Q40.1 R103.1 R106.2 | length 6.6
  B.Cu w0.3: 40.123,235.19 41.745,233.568 Q40.1@46.021,233.568
NetC38_2: C38.2 Q41.1 R108.1 R109.2 | length 8.4
  B.Cu w0.3: 42.198,211.851 45.896,211.851 Q41.1@46.021,211.726 47.662,211.726 49.298,210.09 49.903,210.09
NetC39_2: C39.2 Q42.1 R107.1 R110.2 | length 6.5
  B.Cu w0.3: 40.123,220.69 40.598,220.69 42.062,219.226 Q42.1@46.021,219.226
NetC40_2: C40.2 Q43.1 R112.1 R113.2 | length 8.5
  B.Cu w0.3: 42.198,197.254 45.896,197.254 Q43.1@46.021,197.129 47.559,197.129 49.298,195.39 49.903,195.39
NetC41_2: C41.2 Q44.1 R111.1 R114.2 | length 6.5
  B.Cu w0.3: 40.123,206.09 40.698,206.09 42.159,204.629 Q44.1@46.021,204.629
NetC42_2: C42.2 Q45.1 R116.1 R117.2 | length 8.1
  B.Cu w0.3: C42.2@42.198,182.707 45.846,182.707 Q45.1@46.021,182.532 47.456,182.532 49.098,180.89 49.573,180.89
NetC43_2: C43.2 Q46.1 R115.1 R118.2 | length 6.5
  B.Cu w0.3: 40.123,191.36 40.983,191.36 C43.2@42.198,190.145 42.373,189.97 Q46.1@46.021,189.97
NetC44_2: C44.2 Q47.1 R120.1 R121.2 | length 8.4
  B.Cu w0.3: 42.198,168.065 45.89,168.065 Q47.1@46.021,167.934 47.253,167.934 48.898,166.29 49.873,166.29
NetC45_2: C45.2 Q48.1 R119.1 R122.2 | length 6.4
  B.Cu w0.3: 40.123,176.69 40.798,176.69 41.958,175.529 43.898,175.529 43.993,175.434 Q48.1@46.021,175.434
NetC46_2: C46.2 Q49.1 R124.1 R125.2 | length 8.5
  B.Cu w0.3: 42.198,153.462 45.896,153.462 Q49.1@46.021,153.337 47.151,153.337 48.898,151.59 49.903,151.59
NetC47_2: C47.2 Q50.1 R123.1 R126.2 | length 6.5
  B.Cu w0.3: 40.123,162.29 40.698,162.29 42.151,160.837 Q50.1@46.021,160.837
NetC48_2: C48.2 Q51.1 R128.1 R129.2 | length 8.7
  B.Cu w0.3: 40.123,174.99 40.423,174.69 43.498,174.69 43.636,174.552 Q51.1@43.636,173.403 47.263,173.403 C48.2@47.438,173.228
NetC49_2: C49.2 Q52.1 R127.1 R130.2 | length 6.9
  B.Cu w0.3: Q52.1@43.636,166.24 43.811,166.065 C49.2@47.438,166.065 47.523,166.065 48.898,164.69 49.873,164.69
NetC50_2: C50.2 Q53.1 R132.1 R133.2 | length 5.7
  B.Cu w0.3: 40.423,142.24 40.623,142.04 Q53.1@46.021,142.04
NetC51_2: C51.2 Q54.1 R131.1 R134.2 | length 5.8
  B.Cu w0.3: 40.423,146.39 41.023,145.79 Q54.1@46.021,145.79
NetC52_2: C52.2 Q55.1 R136.1 R137.2 | length 8.7
  B.Cu w0.3: 40.123,160.69 40.775,160.69 41.365,160.1 43.188,160.1 43.636,159.652 Q55.1@43.636,158.8 43.723,158.712 45.671,158.712 45.758,158.8 45.908,158.65 47.413,158.65 47.438,158.675
NetC53_2: C53.2 Q56.1 R135.1 R138.2 | length 6.8
  B.Cu w0.3: Q56.1@43.636,151.24 48.048,151.24 49.298,149.99 49.903,149.99
NetC54_2: C54.2 Q57.1 R140.1 R141.2 | length 8.4
  B.Cu w0.3: 42.198,299.455 46.733,299.455 47.198,298.99 48.703,298.99 49.903,297.79
NetC55_2: C55.2 Q58.1 R139.1 R142.2 | length 6.2
  B.Cu w0.3: 40.123,308.39 41.098,308.39 41.858,307.63 Q58.1@46.021,307.63
NetC56_2: C56.2 Q59.1 R144.1 R145.2 | length 8.5
  B.Cu w0.3: 42.198,285.015 47.273,285.015 47.798,284.49 48.403,284.49 49.903,282.99
NetC57_2: C57.2 Q60.1 R143.1 R146.2 | length 6.4
  B.Cu w0.3: 40.123,293.49 40.323,293.29 40.698,293.29 41.718,292.27 Q60.1@46.021,292.27
NetC58_2: C58.2 Q61.1 R148.1 R149.2 | length 8
  B.Cu w0.3: 40.123,306.79 41.663,305.25 43.496,305.25 43.621,305.125 47.438,305.125
NetC59_2: C59.2 Q62.1 R147.1 R150.2 | length 7
  B.Cu w0.3: Q62.1@43.636,297.78 47.808,297.78 49.498,296.09 49.903,296.09
NetC60_2: C60.2 Q63.1 R152.1 R153.2 | length 5.6
  B.Cu w0.254: Q63.1@43.446,319.44 43.571,319.315 48.998,319.315
NetC61_2: C61.2 Q64.1 R151.1 R154.2 | length 5.6
  B.Cu w0.254: Q64.1@43.446,314.18 43.511,314.115 48.998,314.115
NetJ9_1: J9.1 R90.1 | length 2.9
  F.Cu w0.254: R90.1@38.298,128.79 38.368,128.86 J9.1@41.148,128.86
NetJ9_2: J9.2 R89.1 | length 2.6
  F.Cu w0.254: R89.1@43.648,131.44 43.648,128.9 J9.2@43.688,128.86
NetJ9_3: J9.3 R87.1 | length 23.5
  F.Cu w0.254: R87.1@23.753,128.79 31.198,128.79 32.398,127.59 44.958,127.59 J9.3@46.228,128.86
NetJ9_4: J9.4 R88.1 | length 3
  F.Cu w0.254: J9.4@48.768,128.86 48.798,128.89 R88.1@51.773,128.89
NetK1_A1: K1.A1 Q4.3 | length 2.6
  B.Cu w0.6: K1.A1@39.298,289.283 39.605,289.59 Q4.3@41.771,289.59
NetK1_A2: K1.A2 Q3.3 | length 2.7
  B.Cu w0.6: K1.A2@39.298,281.783 39.888,282.372 Q3.3@41.771,282.372
NetK4_A1: K4.A1 Q18.3 | length 2.5
  B.Cu w0.6: K4.A1@39.298,274.679 39.459,274.84 Q18.3@41.771,274.84
NetK4_A2: K4.A2 Q19.3 | length 2.6
  B.Cu w0.6: K4.A2@39.298,267.179 39.531,267.412 Q19.3@41.771,267.412
NetK5_A1: K5.A1 Q20.3 | length 2.5
  B.Cu w0.6: K5.A1@39.298,260.075 39.311,260.062 Q20.3@41.771,260.062
NetK5_A2: K5.A2 Q21.3 | length 2.5
  B.Cu w0.6: K5.A2@39.298,252.575 39.331,252.542 Q21.3@41.771,252.542
NetK6_A1: K6.A1 Q22.3 | length 2.5
  B.Cu w0.6: K6.A1@39.298,245.472 39.386,245.384 Q22.3@41.771,245.384
NetK6_A2: K6.A2 Q23.3 | length 2.5
  B.Cu w0.6: K6.A2@39.298,237.972 39.439,238.112 Q23.3@41.771,238.112
NetK7_A1: K7.A1 Q24.3 | length 2.5
  B.Cu w0.6: K7.A1@39.298,230.868 39.386,230.78 Q24.3@41.771,230.78
NetK7_A2: K7.A2 Q25.3 | length 2.6
  B.Cu w0.6: K7.A2@39.298,223.368 39.542,223.612 Q25.3@41.771,223.612
NetK8_A1: K8.A1 Q26.3 | length 2.5
  B.Cu w0.6: K8.A1@39.298,216.264 39.386,216.177 Q26.3@41.771,216.177
NetK8_A2: K8.A2 Q27.3 | length 2.5
  B.Cu w0.6: K8.A2@39.298,208.764 39.466,208.932 Q27.3@41.771,208.932
NetK9_A1: K9.A1 Q28.3 | length 2.5
  B.Cu w0.6: K9.A1@39.298,201.661 39.376,201.582 Q28.3@41.771,201.582
NetK9_A2: K9.A2 Q29.3 | length 2.6
  B.Cu w0.6: K9.A2@39.298,194.161 39.69,194.552 Q29.3@41.771,194.552
NetK10_A1: K10.A1 Q30.3 | length 2.5
  B.Cu w0.6: K10.A1@39.298,187.057 39.386,186.97 Q30.3@41.771,186.97
NetK10_A2: K10.A2 Q31.3 | length 2.6
  B.Cu w0.6: K10.A2@39.298,179.557 39.531,179.79 Q31.3@41.771,179.79
NetK11_A1: K11.A1 Q33.3 | length 2.8
  B.Cu w0.6: Q33.3@47.896,271.08 50.713,271.08 K11.A1@50.728,271.065
NetK11_A2: K11.A2 Q35.3 | length 2.9
  B.Cu w0.6: Q35.3@47.896,278.62 50.673,278.62 K11.A2@50.728,278.565
NetK12_A1: K12.A1 Q34.3 | length 2.8
  B.Cu w0.6: Q34.3@47.896,256.468 K12.A1@50.728,256.468
NetK12_A2: K12.A2 Q36.3 | length 3
  B.Cu w0.6: Q36.3@47.896,263.64 50.4,263.64 K12.A2@50.728,263.968
NetK13_A1: K13.A1 Q37.3 | length 2.8
  B.Cu w0.6: Q37.3@47.896,241.871 K13.A1@50.728,241.871
NetK13_A2: K13.A2 Q38.3 | length 2.9
  B.Cu w0.6: Q38.3@47.986,249.09 50.447,249.09 K13.A2@50.728,249.371
NetK14_A1: K14.A1 Q39.3 | length 2.8
  B.Cu w0.6: Q39.3@47.896,227.273 K14.A1@50.728,227.273
NetK14_A2: K14.A2 Q40.3 | length 2.9
  B.Cu w0.6: Q40.3@47.896,234.518 50.473,234.518 K14.A2@50.728,234.773
NetK15_A1: K15.A1 Q41.3 | length 2.8
  B.Cu w0.6: Q41.3@47.896,212.676 K15.A1@50.728,212.676
NetK15_A2: K15.A2 Q42.3 | length 2.8
  B.Cu w0.6: Q42.3@47.896,220.176 K15.A2@50.728,220.176
NetK16_A1: K16.A1 Q43.3 | length 2.8
  B.Cu w0.6: Q43.3@47.896,198.079 K16.A1@50.728,198.079
NetK16_A2: K16.A2 Q44.3 | length 2.8
  B.Cu w0.6: Q44.3@47.896,205.579 K16.A2@50.728,205.579
NetK17_A1: K17.A1 Q45.3 | length 2.8
  B.Cu w0.6: Q45.3@47.896,183.482 K17.A1@50.728,183.482
NetK17_A2: K17.A2 Q46.3 | length 2.9
  B.Cu w0.6: Q46.3@47.896,190.92 50.666,190.92 K17.A2@50.728,190.982
NetK18_A1: K18.A1 Q47.3 | length 2.8
  B.Cu w0.6: Q47.3@47.896,168.884 K18.A1@50.728,168.884
NetK18_A2: K18.A2 Q48.3 | length 2.8
  B.Cu w0.6: Q48.3@47.896,176.384 K18.A2@50.728,176.384
NetK19_A1: K19.A1 Q49.3 | length 2.8
  B.Cu w0.6: Q49.3@47.896,154.287 K19.A1@50.728,154.287
NetK19_A2: K19.A2 Q50.3 | length 2.8
  B.Cu w0.6: Q50.3@47.896,161.787 K19.A2@50.728,161.787
NetK20_A1: K20.A1 Q51.3 | length 2.5
  B.Cu w0.6: K20.A1@39.298,172.453 Q51.3@41.761,172.453
NetK20_A2: K20.A2 Q52.3 | length 2.6
  B.Cu w0.6: K20.A2@39.298,164.953 39.634,165.29 Q52.3@41.761,165.29
NetK21_A1: K21.A1 Q53.3 | length 4.5
  B.Cu w0.6: Q53.3@47.896,142.99 47.896,142.522 K21.A1@50.728,139.69
NetK21_A2: K21.A2 Q54.3 | length 3
  B.Cu w0.6: Q54.3@47.896,146.74 48.346,147.19 K21.A2@50.728,147.19